# Altium PCB RPE_PCB.PcbDoc (part 1 of 2)
Units mm, origin at the board's own origin, x right, y up, seen from the top; angles counter-clockwise.
Board outline 86.99 x 60.07 mm, 4 copper layers (Top Layer, GND, Layer 2, Bottom Layer), stack 0.603 mm thick; 49 components, 31 nets, 149 pads, 32 vias.
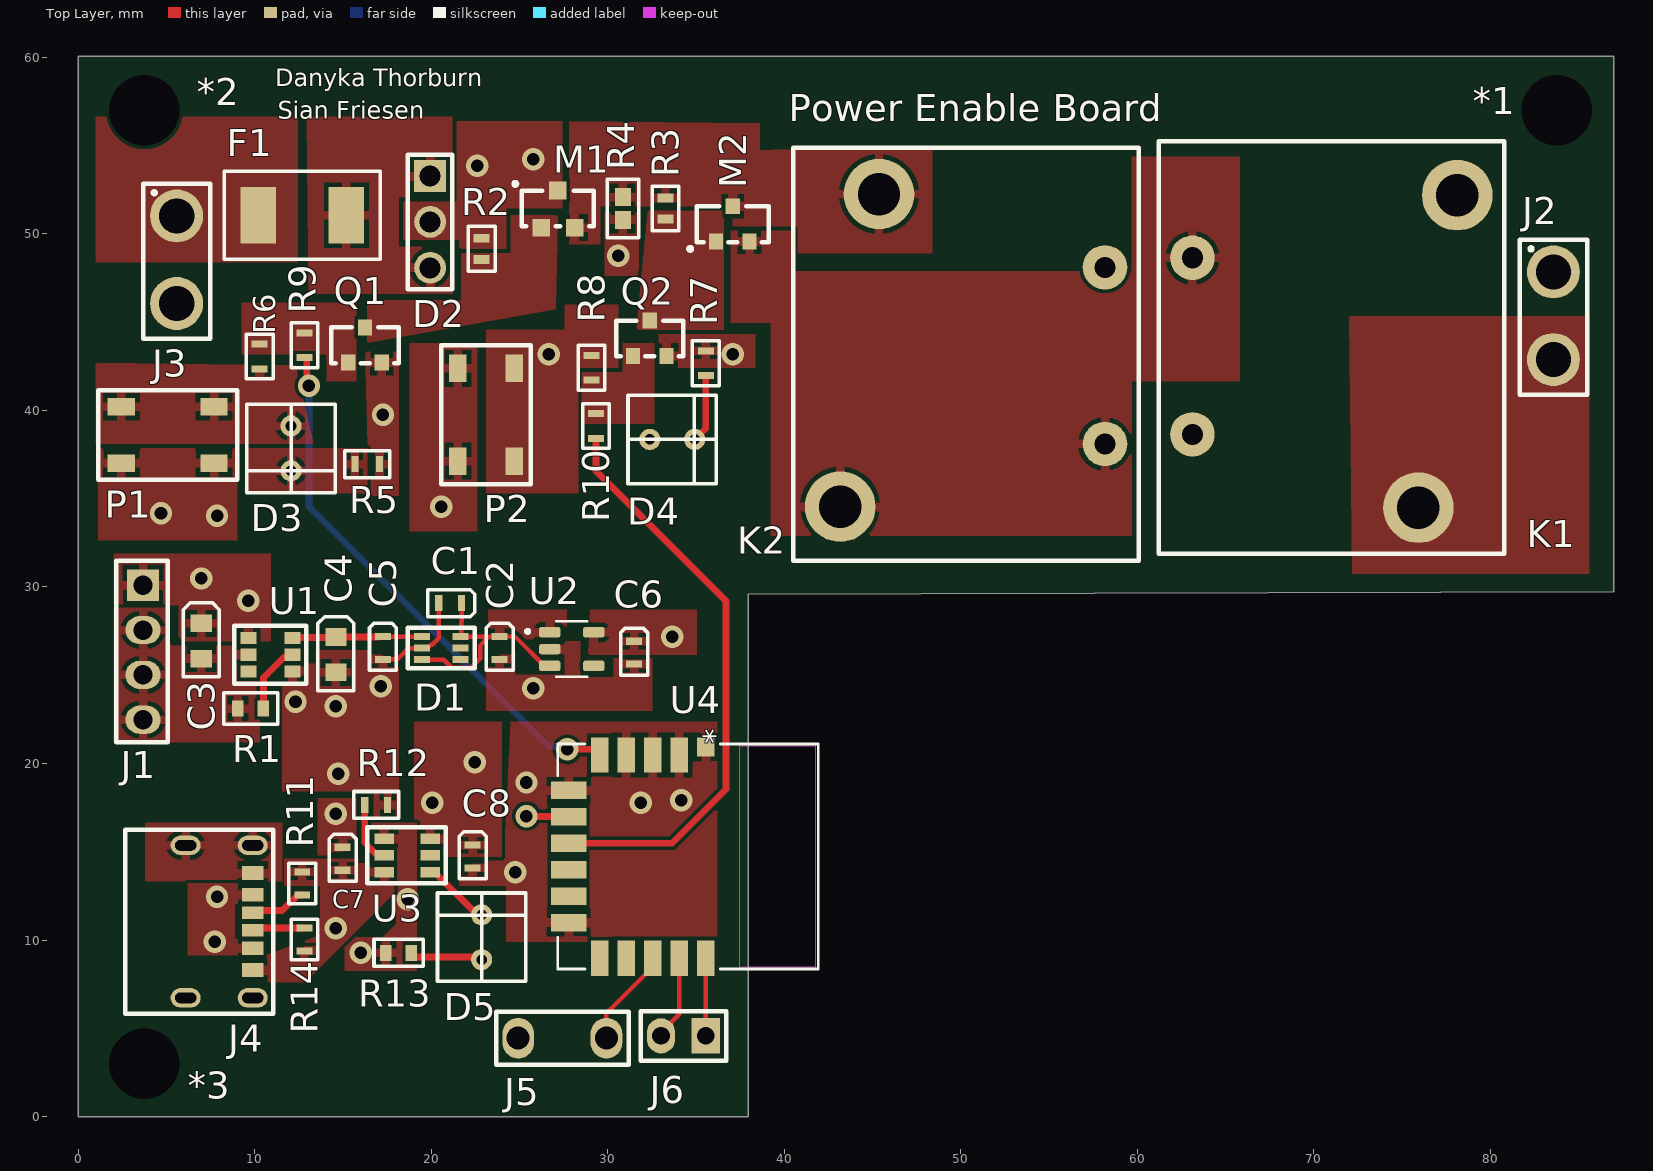
[diagram p0: Top Layer view]
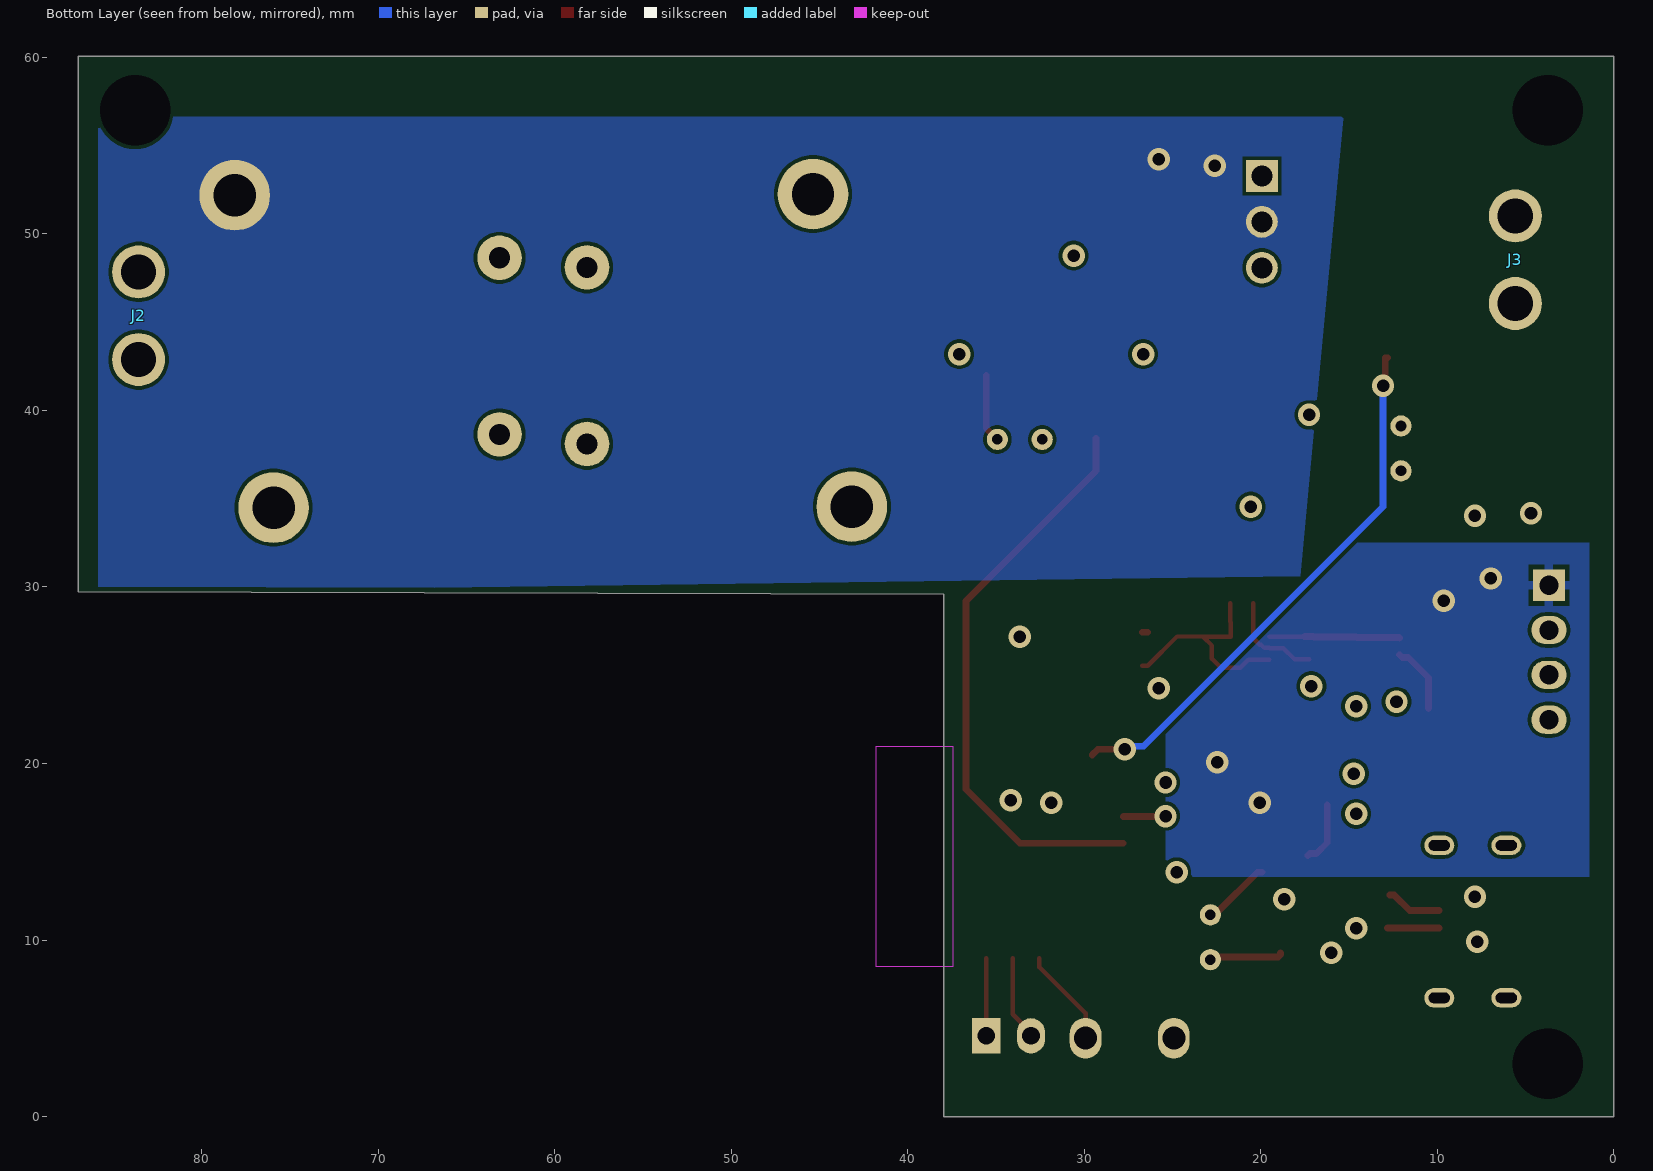
[diagram p1: Bottom Layer view, seen from below]
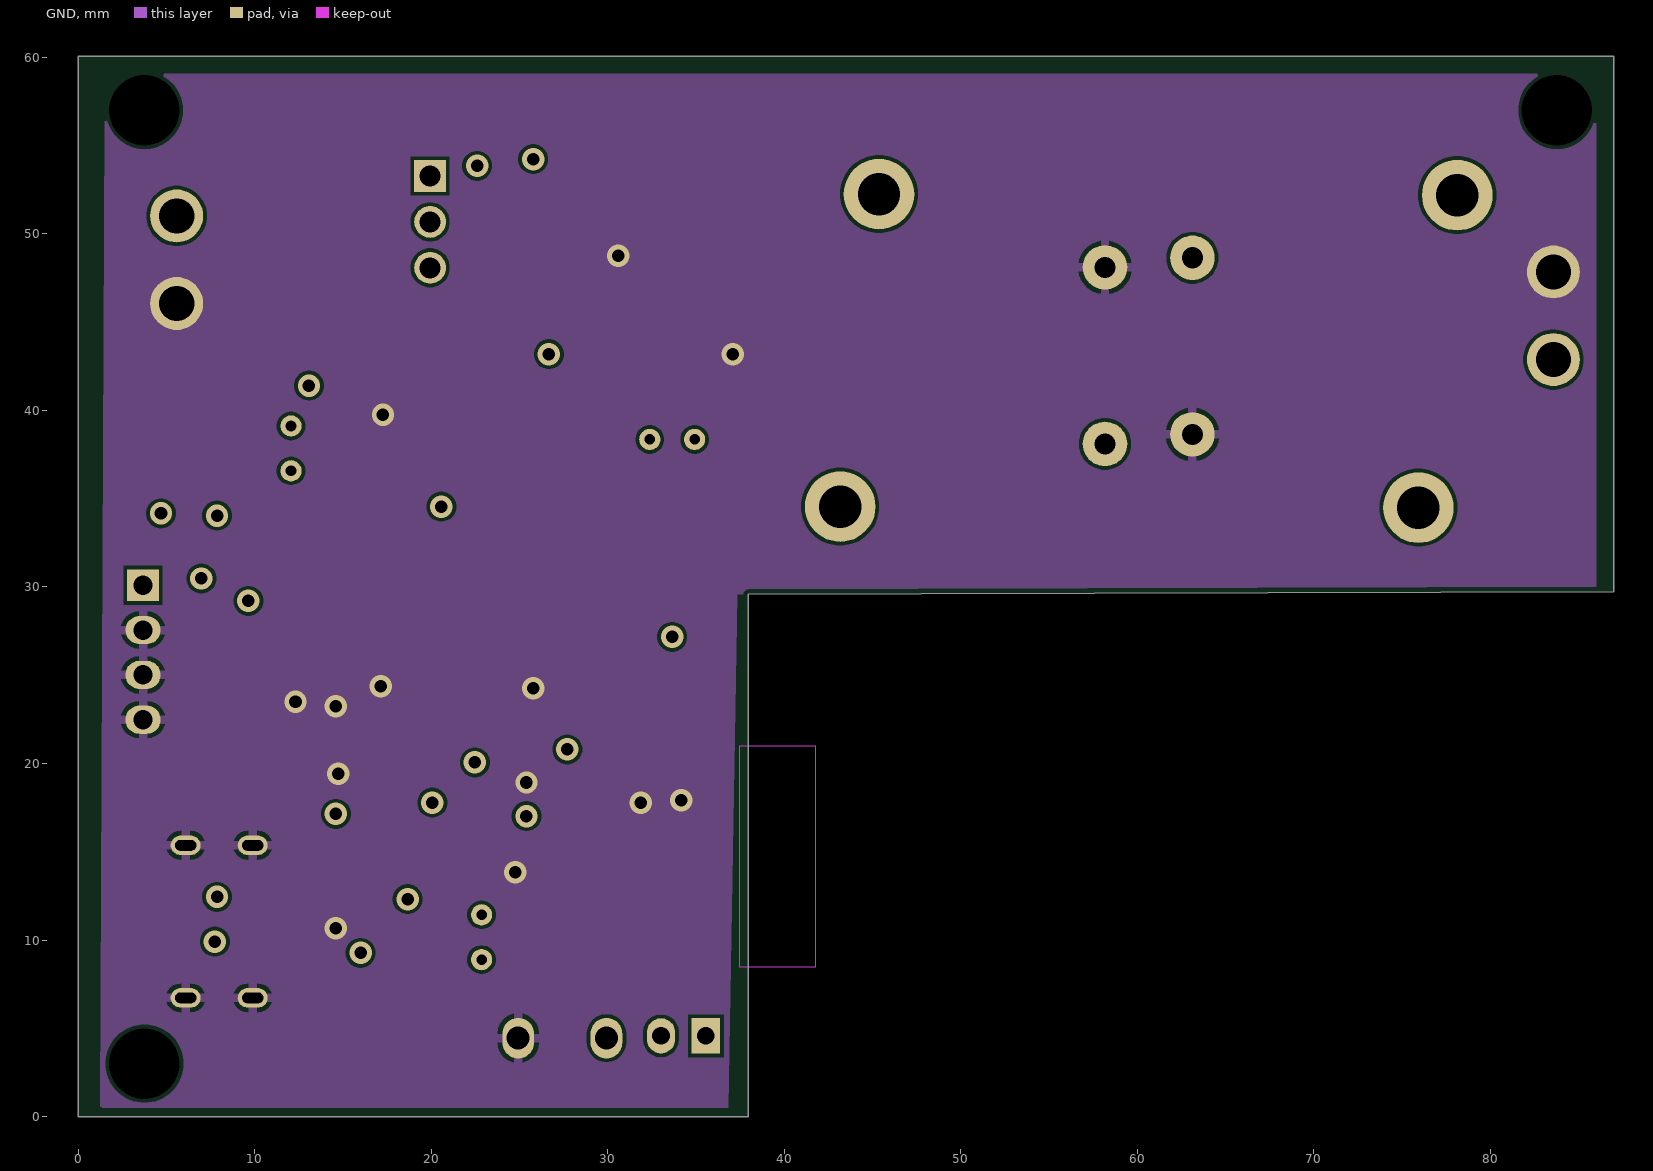
[diagram p2: GND]
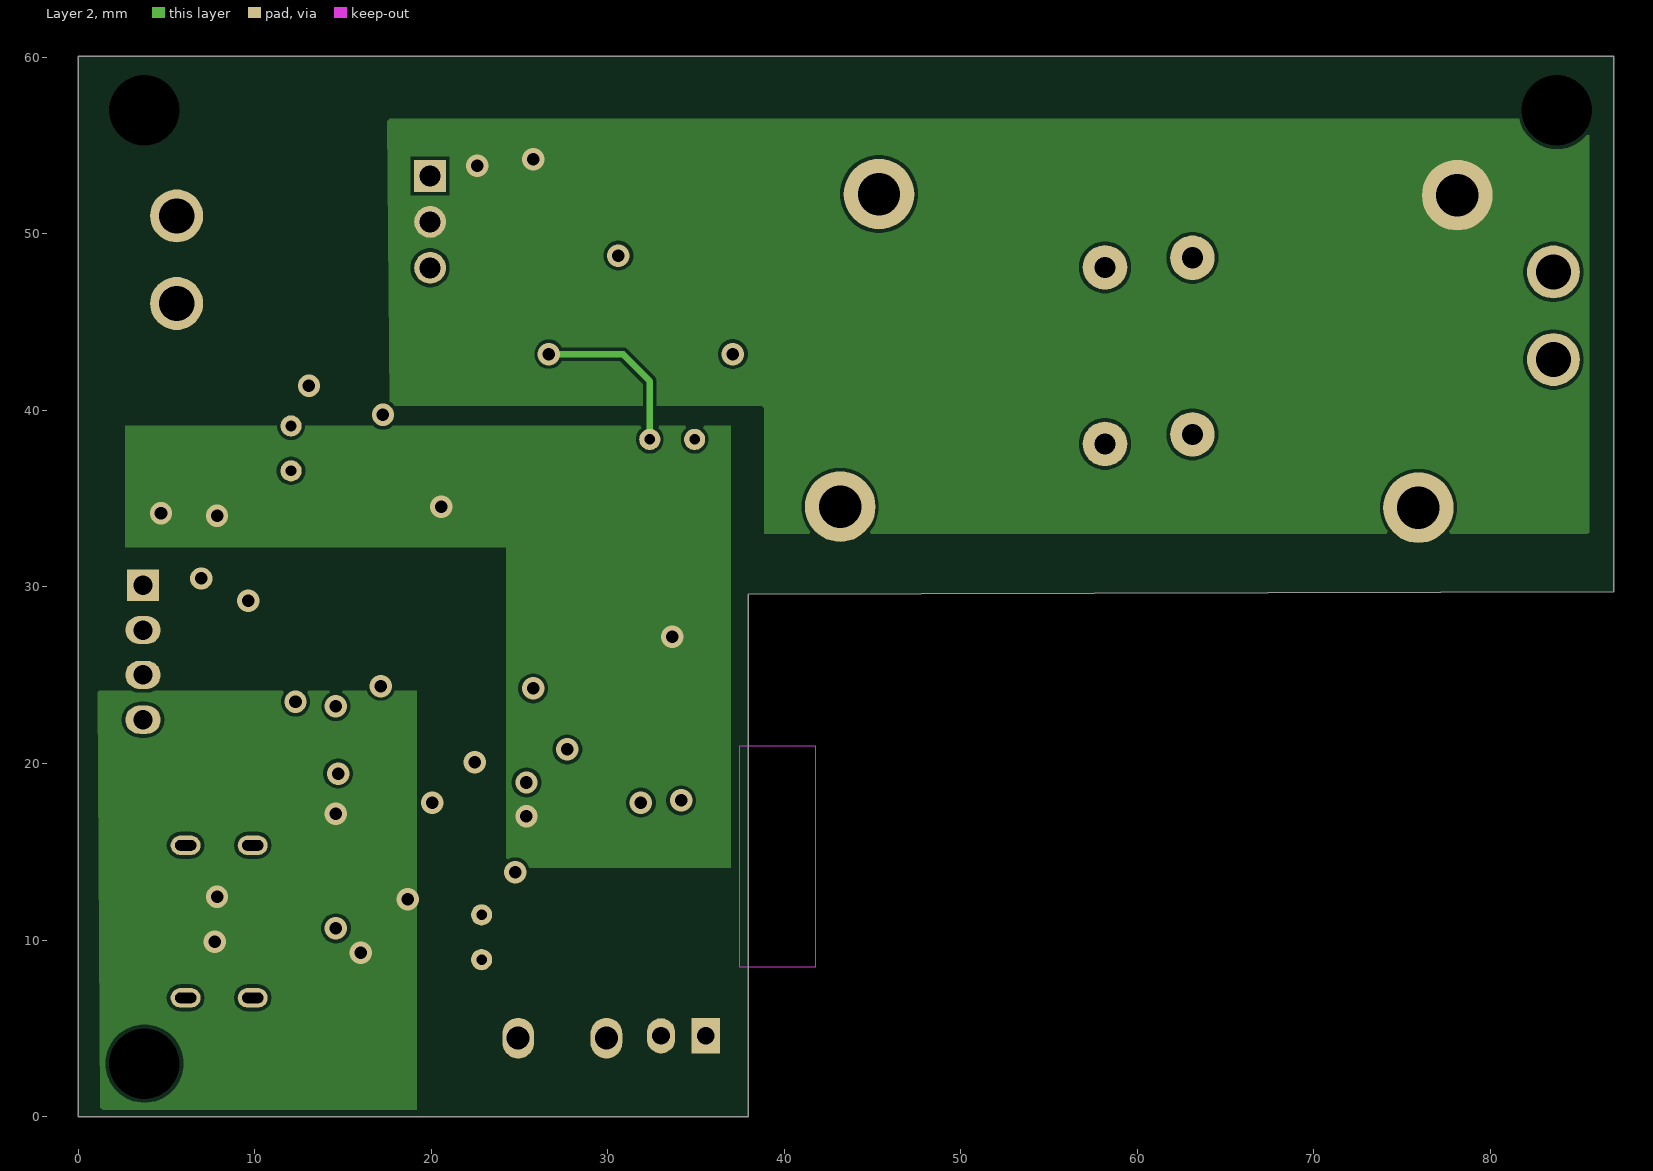
[diagram p3: Layer 2]

## Layer stack, top to bottom
Top Solder: solder mask 0.0102, Solder Resist, Dk 3.5
Top Layer: signal copper 0.0356
Dielectric 2: prepreg 0.0711, PP-006, Dk 4.1
GND: signal copper 0.035
Dielectric 1: dielectric 0.32, FR-4, Dk 4.8
Layer 2: signal copper 0.035
Dielectric 5: prepreg 0.0711, PP-006, Dk 4.1
Bottom Layer: signal copper 0.0356
Bottom Solder: solder mask 0.0102, Solder Resist, Dk 3.5

## Board outline
86.995,29.721 86.995,60.071 0,60.071 0,0 37.973,0 37.973,29.575

## Design rules (kind name [scope] priority, off if disabled: settings)
BoardOutlineClearance [All] p1: gap=0.3 ignorepadtopadclearanceinfootprint=FALSE except(0.4: Arc-SplitBarrior Arc-SplitContinuation Track-SplitBarrior Track-SplitContinuation SMDPad-SplitBarrior SMDPad-SplitContinuation THPad-SplitBarrior THPad-SplitContinuation Via-SplitBarrior Via-SplitContinuation Fill-SplitBarrior Fill-SplitContinuation Poly-SplitBarrior Poly-SplitContinuation Region-SplitBarrior Region-SplitContinuation Text-SplitBarrior Text-SplitContinuation)
Clearance "Clearance Different Nets" [All] p1: gap=0.2 ignorepadtopadclearanceinfootprint=FALSE except(0.089: Arc-Arc Arc-Track Arc-SMDPad Track-Track Track-SMDPad; 0.127: SMDPad-SMDPad SMDPad-Via THPad-Via Via-Via; 0.254: Arc-Via Arc-Text Track-Via Track-Text SMDPad-Text THPad-Text Via-Text Fill-Text Poly-Text Region-Text Text-Text; 0.5: THPad-THPad Via-Hole)
Clearance "Clearance Same Nets" [All] p2: gap=0.2 ignorepadtopadclearanceinfootprint=FALSE except(0.089: Arc-Arc Arc-Track Arc-SMDPad Track-Track Track-SMDPad SMDPad-SMDPad; 0.127: SMDPad-Via THPad-Via; 0.254: Arc-Via Arc-Text Track-Via Track-Text SMDPad-Text THPad-Text Via-Via Via-Text Fill-Text Poly-Text Region-Text Text-Text)
Clearance "Clearance Bottom Layer" [OnLayer('Bottom Layer')] p3: gap=0.203 ignorepadtopadclearanceinfootprint=TRUE except(0.254: Arc-Text Track-Text SMDPad-Text THPad-Text Via-Text Fill-Text Poly-Text Region-Text Text-Text)
Clearance "Clearance Top Layer" [OnLayer('Top Layer')] p4: gap=0.203 ignorepadtopadclearanceinfootprint=TRUE except(0.254: Arc-Text Track-Text SMDPad-Text THPad-Text Via-Text Fill-Text Poly-Text Region-Text Text-Text)
HoleSize [All] p1: absolutevalues=TRUE maxlimit=6.3 minlimit=0.2 maxpercent=80.000 minpercent=20.000
MinimumAnnularRing [All] p1: minimumring=0.13
MinimumSolderMaskSliver [All] p1: minsoldermaskwidth=0.1
PolygonConnect PolygonConnect_12 [InNet('NetJ2_2')] p1: connectstyle=Direct reliefconductorwidth=0.254 reliefentries=4 polygonreliefangle="90 Angle" airgapwidth=0.254
PolygonConnect PolygonConnect_11 [InNet('NetK1_1')] p2: connectstyle=Direct reliefconductorwidth=0.254 reliefentries=4 polygonreliefangle="90 Angle" airgapwidth=0.254
PolygonConnect PolygonConnect_10 [InNet('NetK1_2')] p3: connectstyle=Direct reliefconductorwidth=0.254 reliefentries=4 polygonreliefangle="90 Angle" airgapwidth=0.254
PolygonConnect PolygonConnect_9 [InNet('NetM2_G')] p4: connectstyle=Direct reliefconductorwidth=0.254 reliefentries=4 polygonreliefangle="90 Angle" airgapwidth=0.254
PolygonConnect PolygonConnect_8 [InNet('NetQ2_B')] p5: connectstyle=Direct reliefconductorwidth=0.254 reliefentries=4 polygonreliefangle="90 Angle" airgapwidth=0.254
PolygonConnect PolygonConnect_7 [InNet('NetD5_+')] p6: connectstyle=Direct reliefconductorwidth=0.254 reliefentries=4 polygonreliefangle="90 Angle" airgapwidth=0.254
PolygonConnect PolygonConnect_6 [InNet('NetD4_+')] p7: connectstyle=Direct reliefconductorwidth=0.254 reliefentries=4 polygonreliefangle="90 Angle" airgapwidth=0.254
PolygonConnect PolygonConnect_5 [InNet('NetM1_G')] p8: connectstyle=Direct reliefconductorwidth=0.254 reliefentries=4 polygonreliefangle="90 Angle" airgapwidth=0.254
PolygonConnect PolygonConnect_4 [InNet('NetQ1_B')] p9: connectstyle=Direct reliefconductorwidth=0.254 reliefentries=4 polygonreliefangle="90 Angle" airgapwidth=0.254
PolygonConnect PolygonConnect_3 [InNet('NetD1_+')] p10: connectstyle=Direct reliefconductorwidth=0.254 reliefentries=4 polygonreliefangle="90 Angle" airgapwidth=0.254
PolygonConnect PolygonConnect_2 [InNet('NetF1_2')] p11: connectstyle=Direct reliefconductorwidth=0.254 reliefentries=4 polygonreliefangle="90 Angle" airgapwidth=0.254
PolygonConnect [InNet('14V6')] p12: connectstyle=Direct reliefconductorwidth=0.254 reliefentries=4 polygonreliefangle="90 Angle" airgapwidth=0.254
PolygonConnect PolygonConnect_1 [All] p13: thpad.connectstyle=Relief thpad.reliefconductorwidth=0.508 thpad.reliefentries=4 thpad.polygonreliefangle="90 Angle" thpad.airgapwidth=0.254 smdpad.connectstyle=Relief smdpad.reliefconductorwidth=0.508 smdpad.reliefentries=4 smdpad.polygonreliefangle="90 Angle" smdpad.airgapwidth=0.254 via.connectstyle=Direct via.reliefconductorwidth=0.508 via.reliefentries=4 via.polygonreliefangle="90 Angle" via.airgapwidth=0.254
RoutingCorners [All] p1: cornerstyle=Round minsetback=2.54 maxsetback=2.54
RoutingVias [All] p1: holewidth=0.5 width=1 viastyle="Through Hole" minholewidth=0.2 minwidth=0.35 maxholewidth=1 maxwidth=2
SilkToSilkClearance [All] p1: silktosilkclearance=0.1
SilkToSolderMaskClearance [IsPad] p1: minsilkscreentomaskgap=0.1 clearancetoexposedcopper=TRUE
SolderMaskExpansion [All] p1: expansion=0.102 istentingtop=FALSE
Width [All] p1: maxlimit=2.54 minlimit=0.089 preferedwidth=0.381
25 further rules are at their usual default settings.

## Components (designator, comment, footprint, x,y, rotation, side; value= is the part's Value field where it differs from the comment)
*1 "Mounting Holes" "Mounting Holes" 83.762,57 r0 top
*2 "Mounting Holes" "Mounting Holes" 3.762,57 r0 top
*3 "Mounting Holes" "Mounting Holes" 3.762,3 r0 top
C1 "1 uF Capacitor" CL10B105MO8NNWC 21.082,29.083 r0 top value=1uF
C2 "1 uF Capacitor" CL10B105MO8NNWC 23.876,26.543 r90 top value=1uF
C3 "GRM188D71A106MA73J" GRM188D71A106MA73J 6.985,26.94 r90 top value=10uF
C4 "GRM188D71A106MA73J" GRM188D71A106MA73J 14.605,26.162 r90 top value=10uF
C5 "1 uF Capacitor" CL10B105MO8NNWC 17.272,26.543 r90 top value=1uF
C6 "1 uF Capacitor" CL10B105MO8NNWC 31.496,26.274 r90 top value=1uF
C7 "1 uF Capacitor" CL10B105MO8NNWC 14.986,14.605 r90 top value=1uF
C8 "1 uF Capacitor" CL10B105MO8NNWC 22.352,14.732 r90 top value=1uF
D1 "*" LM66100DCKR 20.574,26.543 r0 top
D2 "100V DIODE" FERD40H100STS 19.939,50.673 r270 top
D3 "RED THROUGH HOLE LED" C503B-RCN-CW0Z0AA2 12.065,37.846 r270 top
D4 "RED THROUGH HOLE LED" C503B-RCN-CW0Z0AA2 33.655,38.354 r0 top
D5 "RED THROUGH HOLE LED" C503B-RCN-CW0Z0AA2 22.86,10.16 r90 top
F1 "40A FUSE" 0ACA-9400-TE 12.7,51.054 r180 top
J1 "9-103323-0-04" 9-103323-0-04 3.683,26.289 r0 top
J2 "FIT0588" ? 83.566,45.339 r0 top
J3 "FIT0588" ? 5.588,48.514 r0 top
J4 "USB4125-GF-A-0190" USB4125-GF-A 6.096,11.047 r0 top
J5 "691137710002" 691137710002 27.432,4.445 r270 top
J6 "PREC002SAAN-RC" PREC002SAAN-RC 34.29,4.572 r270 top
K1 "50A RELAY" J116F11A12VDCS.9 63.119,48.641 r270 top
K2 "50A RELAY" J116F11A12VDCS.9 58.166,38.1 r90 top
M1 "ZXM61N03FTA" ZXM61N03FTA 27.178,50.419 r180 top
M2 "ZXM61P03FTA" ZXM61P03FTA 37.084,49.53 r180 top
P1 "*" "PTS 647 SK50 SMTR2 LFS" 5.08,38.608 r180 top
P2 "*" "PTS 647 SK50 SMTR2 LFS" 23.114,39.751 r90 top
Q1 "MMBT4401-7-F" MMBT4401-13-F 16.256,43.561 r270 top
Q2 "MMBT4401-7-F" MMBT4401-13-F 32.385,43.942 r270 top
R1 "RMCF0603FT68K0" RMCF0603FT68K0 9.779,23.114 r0 top value="68 kΩ"
R2 "CR0603-FX-2701ELF" CR0603-FX-2701ELF 22.86,49.149 r90 top value=2.7kΩ
R3 "CR0603-FX-2701ELF" CR0603-FX-2701ELF 33.274,51.435 r90 top value=2.7kΩ
R4 "100 kΩ" CR0603FB100KS1 30.861,51.435 r90 top
R5 "SG73P1JTTD1601F" SG73P1JTTD1601F 16.383,36.957 r180 top value=1.6kΩ
R6 "SG73P1JTTD1601F" SG73P1JTTD1601F 10.287,43.053 r90 top value=1.6kΩ
R7 "SG73P1JTTD1601F" SG73P1JTTD1601F 35.56,42.672 r270 top value=1.6kΩ
R8 "SG73P1JTTD1601F" SG73P1JTTD1601F 29.083,42.418 r270 top value=1.6kΩ
R9 "SG73P1JTTD1601F" SG73P1JTTD1601F 12.827,43.688 r90 top value=1.6kΩ
R10 "SG73P1JTTD1601F" SG73P1JTTD1601F 29.337,39.116 r90 top value=1.6kΩ
R11 "RC0603FR-075K1L" RC0603FR-075K1L 12.7,13.208 r270 top value=5.1kΩ
R12 "Chip Resistor" RC0603JR-133K3L 16.891,17.653 r180 top value=3.3kΩ
R13 "RMCF0603FT620R" RMCF0603FT620R 18.161,9.271 r180 top value=620Ω
R14 "RC0603FR-075K1L" RC0603FR-075K1L 12.827,10.033 r90 top value=5.1kΩ
U1 "*" AP22653AW6-7 10.882,26.162 r0 top
U2 "*" TC1015-3.3VCT713 28.067,26.416 r0 top
U3 "BQ21040DBVR" BQ21040DBVR 18.669,14.859 r0 top
U4 "DA14531MOD-00F01002" DA14531MOD_REN 34.544,14.732 r270 top

## Footprints (in the part's own frame and the unit in brackets; to place one, negate y for a bottom-side part, rotate by r counter-clockwise, add the part's x,y. Pads: shape width x height; smd on the part's side, far side on the other; paste and mask are expansions set on the pad)
0ACA-9400-TE [mm] "FUSE BOARD MOUNT 40A 63VDC 2SMD"
  rect 2x3.18 smd: 1(-2.5,0) 2(2.5,0)
  silkscreen extent -4.41,-2.5 4.41,2.5
9-103323-0-04 [mm] "CONN HEADER R/A 4POS 2.54MM"
  rect 1.8x1.8 hole 1.1: 1(0,3.81)
  oval 2x1.6 hole 1.1: 2(0,1.27) 3(0,-1.27) 4(0,-3.81)
  silkscreen extent -1.52,-5.08 1.4,5.21
691137710002 [mm] "TERM BLK 2POS SIDE ENTRY 5MM PCB"
  oval 2.3x1.8 hole 1.3: 1(0,2.5) 2(0,-2.5)
  silkscreen extent -1.5,-3.75 1.5,3.75
AP22653AW6-7 [mm] "LOAD SWITCH,SOT26,T&R,3K"
  rect 0.9x0.7 smd mask+0: 1(-1.23,0.95) 2(-1.23,0) 3(-1.23,-0.95) 4(1.27,-0.95) 5(1.27,0) 6(1.27,0.95)
  silkscreen extent -2.03,-1.65 2.03,1.65
BQ21040DBVR [mm] "IC BATT CHG LI-ION 1CELL SOT23-6"
  rect 1.1x0.6 smd: 1(1.27,-0.066) 2(1.27,0.884) 3(1.27,-1.016) 4(-1.33,-0.066) 5(-1.33,-1.016) 6(-1.33,0.884)
  silkscreen extent -2.29,-1.65 2.16,1.52
C503B-RCN-CW0Z0AA2 [mm] "LED RED CLEAR 5MM ROUND T/H"
  round 1.2 hole 0.6: +(-1.27,0) -(1.27,0)
  silkscreen extent -2.5,-2.5 2.5,2.5
CL10B105MO8NNWC [mm] "CAP CER 1UF 16V X7R 0603"
  rect 0.4x0.9 smd: 1(-0.65,0) 2(0.65,0)
  silkscreen extent -1.27,-0.76 1.4,0.76
CR0603-FX-2701ELF [mm] "RES SMD 2.7K OHM 1% 1/10W 0603"
  rect 0.5x0.9 smd: 1(-0.6,0) 2(0.6,0)
  silkscreen extent -1.27,-0.76 1.27,0.76
CR0603FB100KS1 [mm] "RES,SMD,0603,1%,100K,1/10W"
  rect 1x0.9 smd mask+0: 1(-0.65,0) 2(0.65,0)
  silkscreen extent -1.65,-0.89 1.65,0.89
DA14531MOD_REN [mil]
  rect 43x39 smd paste+0 mask+0: J1(-244.4,39.5)
  rect 79x39 smd paste+0 mask+0: J2(-226.4,-19.6) J3(-226.4,-78.7) J4(-226.4,-137.8) J5(-226.4,-196.9) J12(226.4,-196.9) J13(226.4,-137.8) J14(226.4,-78.7) J15(226.4,-19.6) J16(226.4,39.5)
  rect 39x79 smd paste+0 mask+0: J6(-147.75,-265.75) J7(-88.65,-265.75) J8(-29.55,-265.75) J9(29.55,-265.75) J10(88.65,-265.75) J11(147.75,-265.75)
  Keep-Out Layer region: -246,285.5 -246,114.5 246,114.5 246,285.5
  silkscreen extent -251,-291 251,291
FERD40H100STS [mm] "DIODE FERD 100V 40A TO220AB"
  rect 1.8x1.8 hole 1.2: +(-2.6,0)
  round 1.8 hole 1.2: +(2.6,0) -(0,0)
  silkscreen extent -3.81,-1.27 3.81,1.27
GRM188D71A106MA73J [mm] "CAP CER 10UF 10V X7T 0603"
  rect 1x1.2 smd: 1(-1,0) 2(1,0)
  silkscreen extent -2.03,-1.02 2.16,1.02
J116F11A12VDCS.9 [mm] "RELAY GEN PURPOSE SPST 50A 12V"
  round 4 hole 2.4: 1(-3.55,15) 2(14.15,12.8)
  round 2.524 hole 1.2: 3(0,0) 4(10,0)
  silkscreen extent -6.6,-1.91 16.76,17.65
LM66100DCKR [mm] "IC OR CTRLR IDEAL DIODE SC70-6"
  rect 0.9x0.4 smd mask+0: 1(-1.1,0.65) 2(-1.1,0) 3(-1.1,-0.65) 4(1.1,-0.65) 5(1.1,0) 6(1.1,0.65)
  silkscreen extent -1.91,-1.14 1.91,1.14
MMBT4401-13-F [mm] "TRANS NPN 40V 0.6A SOT23-3"
  rect 0.9x0.8 smd: B(0.857,-0.95) C(-1.143,0) E(0.857,0.95)
  silkscreen extent -1.14,-1.91 0.89,1.91
"Mounting Holes" [mil]
  round 60 hole 157.48 unplated: 1(0,0)
PREC002SAAN-RC [mm] "CONN HEADER VERT 2POS 2.54MM"
  rect 2x1.6 hole 1: 1(0,1.27)
  oval 2x1.6 hole 1: 2(0,-1.27)
  silkscreen extent -1.4,-2.41 1.4,2.41
"PTS 647 SK50 SMTR2 LFS" [mm] "SWITCH TACTILE SPST-NO 0.05A 12V"
  rect 1.55x1 smd: 1(-2.625,1.6) 2(2.625,1.6) 3(-2.625,-1.6) 4(2.625,-1.6)
  silkscreen extent -3.94,-2.54 3.94,2.54
RC0603FR-075K1L [mm] "RES 5.1K OHM 1% 1/10W 0603"
  rect 0.4x0.9 smd: 1(-0.65,0) 2(0.65,0)
  silkscreen extent -1.14,-0.76 1.14,0.76
RC0603JR-133K3L [mm] "RES 3.3K OHM 5% 1/10W 0603"
  rect 0.4x0.9 smd: 1(-0.65,0) 2(0.65,0)
  silkscreen extent -1.27,-0.76 1.27,0.76
RMCF0603FT68K0 [mm] "68k ohm Chip resistor"
  rect 0.65x0.9 smd: 1(-0.725,0) 2(0.725,0)
  silkscreen extent -1.52,-0.89 1.52,0.89
RMCF0603FT620R [mm] "RES 620 OHM 1% 1/10W 0603"
  rect 0.65x0.9 smd: 1(-0.725,0) 2(0.725,0)
  silkscreen extent -1.4,-0.76 1.4,0.76
SG73P1JTTD1601F [mm] "RES 1.6K OHM 1% 1/3W 0603"
  rect 0.4x0.9 smd: 1(-0.7,0) 2(0.7,0)
  silkscreen extent -1.27,-0.76 1.27,0.76
TC1015-3.3VCT713 [mm] "IC REG LINEAR 3.3V 100MA SOT23-5"
  rrect50% 1.22x0.6 smd: 1(-1.347,1.016) 2(-1.347,0.066) 3(-1.347,-0.884) 4(1.143,-0.884) 5(1.143,1.016)
  silkscreen extent -2.7,-1.5 0.78,1.64
USB4125-GF-A [mm] "CONN RCPT TYPE C 6P SMD RA"
  rect 1.2x0.7 smd mask+0: A5(3.8,0.5) B5(3.8,-0.5)
  rect 1.2x0.76 smd mask+0: A9(3.8,-1.52) B9(3.8,1.52)
  rect 1.2x0.8 smd mask+0: A12(3.8,-2.75) B12(3.8,2.75)
  oval 1.7x1.1 hole 0.6 slot 1.2 at 0 deg: Shell_1(0,4.32) Shell_2(3.8,4.32) Shell_3(0,-4.32) Shell_4(3.8,-4.32)
  silkscreen extent -3.43,-5.21 4.95,5.21
ZXM61N03FTA [mm] "MOSFET N-CH 30V 1.4A SOT23-3"
  rect 1x1 smd: D(0,-2.032) G(0.95,0.068) S(-0.95,0.068)
  silkscreen extent -2.03,-2.51 2.51,0
ZXM61P03FTA [mm] "MOSFET P-CH 30V 1.1A SOT23-3"
  rect 0.8x0.9 smd: D(0,-2.032) G(0.95,-0.032) S(-0.95,-0.032)
  silkscreen extent -2.03,-2.03 2.51,0.48
? [mm] "HIGH QUALITY GOLD PLATED XT90 MA Bullet Connector"
  round 3 hole 2: 1(0,2.5) 2(0,-2.46)
  round 2.5 smd far side: 2(0,-2.46)
  silkscreen extent -1.91,-4.44 1.91,4.32

## Part data
C1 C2 C5 C6 C7 C8: library part CL10B105MO8NNWC, "SMD Multilayer Ceramic Capacitor, 1 µF, 16 V, 0603 [1608 Metric], ± 20%, X7R, CL Series", Case Code (Imperial)=0603, Case Code (Metric)=1608, Dielectric=1511DielectricType, Manufacturer=Samsung, Max Operating Temperature=125°C, Min Operating Temperature=-55°C, Supplier Part Number=1276-6524-1-ND, Tolerance=20%, Voltage Rating=16V, Case/Package=0603, Category="Ceramic Capacitors", ComponentLink1Description=https://media.digikey.com/pdf/Data%20Sheets/Samsung%20PDFs/CL10B105MO8NNWC.pdf?src-supplier=Digikey, ComponentLink1URL=https://media.digikey.com/pdf/Data%20Sheets/Samsung%20PDFs/CL10B105MO8NNWC.pdf?src-supplier=Digikey, ComponentLink2Description=http://www.farnell.com/datasheets/2710574.pdf?src-supplier=Farnell, ComponentLink2URL=http://www.farnell.com/datasheets/2710574.pdf?src-supplier=Farnell, ComponentLink3Description=https://datasheet.octopart.com/CL10B105MO8NNWC-Samsung-Electro-Mechanics-datasheet-120079234.pdf?src-supplier=Future+Electronics, ComponentLink3URL=https://datasheet.octopart.com/CL10B105MO8NNWC-Samsung-Electro-Mechanics-datasheet-120079234.pdf?src-supplier=Future+Electronics, ComponentLink4Description=http://www.farnell.com/datasheets/2710574.pdf?src-supplier=Newark, ComponentLink4URL=http://www.farnell.com/datasheets/2710574.pdf?src-supplier=Newark, ComponentLink5Description=http://www.farnell.com/datasheets/2710574.pdf?src-supplier=Element14, ComponentLink5URL=http://www.farnell.com/datasheets/2710574.pdf?src-supplier=Element14, Height=900um, Length=0.063inch, Manufacturer Part Number=CL10B105MO8NNWC, Material=4241ConductorMaterial, Mounting Technology="Surface Mount", Packaging="Cut Tape", Pricing="1=0.1, 10=0.034, 50=0.0196, 100=0.0152, 500=0.01142, 1000=0.00897 (USD)", RoHS=Yes, RoHS Compliant=Yes, Series=CL, Stock=1284189, Supplier=Digikey, Thickness=0.035inch, Voltage Rating (DC)=16V, Width=0.031inch
C3 C4: "Cap 10UF 10VDC X7T 20% SMD 0603 Paper Tape", Case/Package=0603, Dielectric=X7T, Manufacturer=Murata, Max Operating Temperature=125°C, Min Operating Temperature=-55°C, Package Quantity=10000, Supplier Part Number=490-GRM188D71A106MA73JCT-ND, Tolerance=20%, Voltage Rating=10V, Category="Ceramic Capacitors", ComponentLink1Description=http://www.mouser.com/ds/2/281/c02e-2905.pdf?src-supplier=Mouser, ComponentLink1URL=http://www.mouser.com/ds/2/281/c02e-2905.pdf?src-supplier=Mouser, ComponentLink2Description=http://search.murata.co.jp/Ceramy/image/img/A01X/partnumbering_e_01.pdf?src-supplier=Digikey, ComponentLink2URL=http://search.murata.co.jp/Ceramy/image/img/A01X/partnumbering_e_01.pdf?src-supplier=Digikey, Manufacturer Part Number=GRM188D71A106MA73J, Mounting Technology="Surface Mount", Packaging="Tape and Reel", Pricing="1=0.3, 10=0.197, 50=0.145, 100=0.118, 500=0.09316, 1000=0.07867, 2500=0.07453, 5000=0.07039 (USD)", RoHS=Yes, RoHS Compliant=Yes, Series=GRM, Stock=9799, Supplier=Digikey, Voltage Rating (DC)=10V, Weight=0.000222oz
D1: library part LM66100DCKR, "1.5-V to 5.5-V, 1.5-A, 0.5-uA IQ ideal diode with Integrated FET 6-SC70 -40 to 105", Manufacturer="Texas Instruments", Max Operating Temperature=105°C, Max Output current=1.5A, Min Operating Temperature=-40°C, Supplier Part Number=296-53541-1-ND, Category="Integrated Circuits (ICs)", ComponentLink1Description=http://www.ti.com/general/docs/suppproductinfo.tsp?distId=10&amp;gotoUrl=http%3A%2F%2Fwww.ti.com%2Flit%2Fgpn%2flm66100&src-supplier=Digikey, ComponentLink1URL=http://www.ti.com/general/docs/suppproductinfo.tsp?distId=10&amp;gotoUrl=http%3A%2F%2Fwww.ti.com%2Flit%2Fgpn%2flm66100&src-supplier=Digikey, Manufacturer Part Number=LM66100DCKR, Mounting Technology="Surface Mount", Pricing="1=0.41, 10=0.332, 25=0.304, 100=0.2262, 250=0.20504, 500=0.16968, 1000=0.12726 (USD)", RoHS=Yes, Series=-, Stock=1921, Supplier=Digikey, Turn-Off Delay Time=2us, Turn-On Delay Time=27us
D2: library part FERD40H100STS, "FERD40H100 Series 100 V 40 A Field Effect Rectifier Diode - TO-220AB", Average Rectified Current=40A, Case/Package=TO-220-3, Manufacturer=STMicroelectronics, Max Reverse Voltage (DC)=100V, Supplier Part Number=497-16954-ND, Category="Rectifier Diodes", ComponentLink1Description=http://www.st.com/content/ccc/resource/technical/document/datasheet/group3/4e/b5/b8/47/b6/af/41/d6/DM00281757/files/DM00281757.pdf/jcr:content/translations/en.DM00281757.pdf?src-supplier=Digikey, ComponentLink1URL=http://www.st.com/content/ccc/resource/technical/document/datasheet/group3/4e/b5/b8/47/b6/af/41/d6/DM00281757/files/DM00281757.pdf/jcr:content/translations/en.DM00281757.pdf?src-supplier=Digikey, ComponentLink2Description=https://datasheet.octopart.com/FERD40H100STS-STMicroelectronics-datasheet-62332851.pdf?src-supplier=Future+Electronics, ComponentLink2URL=https://datasheet.octopart.com/FERD40H100STS-STMicroelectronics-datasheet-62332851.pdf?src-supplier=Future+Electronics, ComponentLink3Description=https://datasheet.octopart.com/FERD40H100STS-STMicroelectronics-datasheet-141402762.pdf?src-supplier=TME, ComponentLink3URL=https://datasheet.octopart.com/FERD40H100STS-STMicroelectronics-datasheet-141402762.pdf?src-supplier=TME, Diode Type=RECTIFIER, Manufacturer Part Number=FERD40H100STS, Mounting Technology="Through Hole", Packaging=Rail/Tube, Pricing="1=1.4, 50=1.1266, 100=0.8927, 500=0.7567, 1000=0.61641, 2000=0.58028, 5000=0.55264, 10000=0.52714 (USD)", RoHS=Yes, RoHS Compliant=Yes, Series=-, Stock=1657, Supplier=Digikey
D3 D4 D5: library part C503B-RCN-CW0Z0AA2, "CREE - C503B-RCN-CW0Z0AA2 - LED, Red, Through Hole, T-1 3/4 (5mm), 20 mA, 2.1 V, 624 nm", Case/Package=Radial, Color=Red, Forward Current=20mA, Forward Voltage=2.1V, Lens Color=Colorless, Manufacturer=Cree, Max Operating Temperature=100°C, Min Operating Temperature=-40°C, Package Quantity=2500, Supplier Part Number=C503B-RCN-CW0Z0AA2CT-ND, Category=LEDs, ComponentLink1Description=https://datasheet.ciiva.com/8076/c503brasranaasaanrbsrbnabsabnrcsrcnacsacn1079-8076255.pdf?src-supplier=Element14, ComponentLink1URL=https://datasheet.ciiva.com/8076/c503brasranaasaanrbsrbnabsabnrcsrcnacsacn1079-8076255.pdf?src-supplier=Element14, ComponentLink2Description=https://datasheet.ciiva.com/46396/1783695-46396283.pdf?src-supplier=Element14, ComponentLink2URL=https://datasheet.ciiva.com/46396/1783695-46396283.pdf?src-supplier=Element14, ComponentLink3Description=https://datasheet.ciiva.com/2116/c503brasranaasaanrbsrbnabsabnrcsrcnacsacn1079-2116093.pdf?src-supplier=Digikey, ComponentLink3URL=https://datasheet.ciiva.com/2116/c503brasranaasaanrbsrbnabsabnrcsrcnacsacn1079-2116093.pdf?src-supplier=Digikey, Dominant Wavelength=624nm, Height=10.3mm, Illumination Color=Red, Lens Style=Dome,Elliptical,Round, Lens Transparency=Clear, Luminous Intensity=7500mcd, Manufacturer Part Number=C503B-RCN-CW0Z0AA2, Mounting Technology="Through Hole", Number of LEDs=1, Packaging="Cut Tape", Pins=5, Pricing="1=0.18, 10=0.167, 100=0.1548, 1000=0.139 (USD)", Reach SVHC Compliant=Unknown, RoHS=Yes, RoHS Compliant=Yes, Series=-, Stock=49819, Supplier=Digikey, Test Current=20mA, Viewing Angle=30°, Wavelength=624nm
F1: library part 0ACA-9400-TE, "Bel Fuse, Internal Part #: 0ACA-9400-TE 40A FUSE", Manufacturer=Bel, Supplier Part Number=507-0ACA-9400-TECT-ND, Category=Fuses, Manufacturer Part Number=0ACA-9400-TE, Pricing="1=1.32, 5=1.282, 10=1.199, 50=0.9926, 100=0.8272, 250=0.80652, 500=0.68244 (USD)", RoHS=Yes, Stock=695, Supplier=Digikey
J1: "CONN HEADR BRKWAY .100 04POS R/A 4 PIN HEADER", Case/Package=100, Flammability Rating="UL94 V-0", Housing Color=Black, Manufacturer="TE Connectivity", Max Operating Temperature=105°C, Min Operating Temperature=-65°C, Supplier Part Number=A32705-04-ND, Category=Connectors, ComponentLink1Description=http://www.te.com/commerce/DocumentDelivery/DDEController?Action=srchrtrv&DocNm=103323&DocType=Customer+Drawing&DocLang=English&src-supplier=Digikey, ComponentLink1URL=http://www.te.com/commerce/DocumentDelivery/DDEController?Action=srchrtrv&DocNm=103323&DocType=Customer+Drawing&DocLang=English&src-supplier=Digikey, Contact Finish - Mating=TIN, Contact Material="Copper Alloy", Contact Shape=Square, Contact Type="Male Pin", Fastening Type=Pull, Gender=Male, Height=3.5mm, Housing Material=Plastic, Insulation Color=Black, Insulation Material=Thermoplastic, Lead Free="Lead Free", Length=9.75mm, Manufacturer Part Number=9-103323-0-04, Mounting Technology="Through Hole", Number of Contacts=4, Number of Positions=4, Number of Rows=1, Packaging=Bulk, Pricing="1=0.69, 10=0.672, 100=0.5422, 500=0.4801, 1000=0.4208, 5000=0.36714, 10000=0.34172 (USD)", RoHS=Yes, Series="AMPMODU MOD II", Stock=9773, Supplier=Digikey, Termination=Solder, Width=2.29mm
J2 J3: "High Quality Gold Plated Male and Female Bullet Connector", Manufacturer=DFRobot, Supplier Part Number=1738-1438-ND, Category=LDO, ComponentLink1Description=https://media.digikey.com/pdf/Data%20Sheets/DFRobot%20PDFs/FIT0588_Web.pdf?src-supplier=Digikey, ComponentLink1URL=https://media.digikey.com/pdf/Data%20Sheets/DFRobot%20PDFs/FIT0588_Web.pdf?src-supplier=Digikey, Manufacturer Part Number=FIT0588, Pricing="1=3.9 (USD)", RoHS=No, Stock=1280, Supplier=Digikey
J4: "USB Connector, 24 Contact(s), Female, Right Angle, Solder Terminal, Locking, Receptacle", Current Rating=3A, Manufacturer="Global Connector Technology", Max Operating Temperature=85°C, Min Operating Temperature=-30°C, Supplier Part Number=56AJ0230, Voltage Rating=20V, Category="USB Connectors", Contact Material=157ConductorMaterial, Height=3.41mm, Manufacturer Part Number=USB4125-GF-A-0190, Number of Contacts=6NUMBER, Pricing="1=0.379, 50=0.379, 100=0.347, 250=0.347, 500=0.32, 1000=0.32, 1500=0.32, 3000=0.298 (USD)", RoHS=No, Stock=2157, Supplier=Newark, USB Standard=6108USBStandard
J5: "Series 1377 - 5.00 mm Horizontal Entry with Pressure Clamp WR-TBL, 2 pin", Color=Green, Current=16A, Manufacturer="Wurth Electronics", Max Operating Temperature=120°C, Min Operating Temperature=-30°C, Supplier Part Number=732-10955-ND, Voltage=300V, Category="Terminal Blocks", ComponentLink1Description=https://katalog.we-online.de/em/datasheet/691137710002.pdf?src-supplier=Digikey, ComponentLink1URL=https://katalog.we-online.de/em/datasheet/691137710002.pdf?src-supplier=Digikey, Contact Material=153,154ConductorMaterial, Current Rating=16A, Height=11.6mm, Housing Material=PC, Lead Pitch=5mm, Manufacturer Part Number=691137710002, Mounting Technology="Through Hole", Number of Contacts=2NUMBER, Number of Levels=1, Number of Positions Per Level=2, Number of Rows=1NUMBER, Pins=2NUMBER, Plating="Copper Alloy,ZINC PLATED", Pricing="1=0.41, 10=0.363, 50=0.32, 100=0.287, 500=0.277 (USD)", RoHS=Yes, RoHS Compliant=Yes, Series="WR-TBL Series 1377", Stock=5754, Supplier=Digikey, Termination=Screw, Voltage Rating=300V, Wire Gauge (Max)=30AWG, Wire Gauge (Min)=12AWG
J6: "CONN HEADER VERT 2POS 2.54MM"
K1 K2: library part J116F11A12VDCS.9, "Relay Gen Purpose SPST 50A 12V", Manufacturer="CIT Relay & Switch", Supplier Part Number=2449-J116F11A12VDCS.9-ND, Category="Power Relays", Manufacturer Part Number=J116F11A12VDCS.9, Pricing="1=3.35, 15=3.136, 30=2.78767, 60=2.64817, 105=2.50886, 255=2.23008, 510=2.09071, 1005=1.95132, 5010=1.88163 (USD)", RoHS=No, Stock=434, Supplier=Digikey
M1: "N-Channel 30V 1.4A (Ta) 625mW (Ta) Surface Mount SOT-23-3", Case/Package=SOT-23, Continuous Drain Current (ID)=1.4A, Current Rating=1.2A, Drain to Source Resistance=220mR, Drain to Source Voltage (Vdss)=30V, Gate to Source Voltage (Vgs)=20V, Input Capacitance=150pF, Manufacturer="Diodes Zetex", Max Operating Temperature=150°C, Max Power Dissipation=625mW, Min Operating Temperature=-55°C, Package Quantity=3000, Power Dissipation=806mW, Supplier Part Number=ZXM61N03FCT-ND, Category=MOSFETs, ComponentLink1Description=https://datasheet.ciiva.com/11176/zxm61n03f-11176547.pdf?src-supplier=Avnet, ComponentLink1URL=https://datasheet.ciiva.com/11176/zxm61n03f-11176547.pdf?src-supplier=Avnet, ComponentLink2Description=https://datasheet.ciiva.com/935/zxm61n03f-935122.pdf?src-supplier=Digikey, ComponentLink2URL=https://datasheet.ciiva.com/935/zxm61n03f-935122.pdf?src-supplier=Digikey, ComponentLink3Description=https://datasheet.ciiva.com/5775/1643170-5775147.pdf?src-supplier=Farnell, ComponentLink3URL=https://datasheet.ciiva.com/5775/1643170-5775147.pdf?src-supplier=Farnell, ComponentLink4Description=https://datasheet.ciiva.com/935/zxm61n03f-935123.pdf?src-supplier=Digikey, ComponentLink4URL=https://datasheet.ciiva.com/935/zxm61n03f-935123.pdf?src-supplier=Digikey, ComponentLink5Description=https://datasheet.ciiva.com/935/zxm61n03f-935124.pdf?src-supplier=Digikey, ComponentLink5URL=https://datasheet.ciiva.com/935/zxm61n03f-935124.pdf?src-supplier=Digikey, ComponentLink6Description=https://datasheet.ciiva.com/8024/1643170-8024088.pdf?src-supplier=Element14, ComponentLink6URL=https://datasheet.ciiva.com/8024/1643170-8024088.pdf?src-supplier=Element14, Drain-source On Resistance-Max=220mR, Dual Supply Voltage=30V, Fall Time=2.5ns, Height=1.02mm, Lead Free="Lead Free", Length=3.04mm, Manufacturer Part Number=ZXM61N03FTA, Mounting Technology="Surface Mount", Nominal Vgs=1V, Number of Channels=1, Number of Elements=1, Packaging="Tape and Reel", Pins=3, Polarity=N-CHANNEL, Pricing="1=0.46, 10=0.397, 100=0.2757, 500=0.21528, 1000=0.17498 (USD)", Radiation Hardening=No, Rds On Max=220mR, Reach SVHC Compliant=No, Rise Time=2.5ns, RoHS=Yes, RoHS Compliant=Yes, Series=-, Stock=146742, Supplier=Digikey, Termination=SMD/SMT, Turn-Off Delay Time=5.8ns, Turn-On Delay Time=1.9ns, Voltage Rating (DC)=30V, Weight=0.000282oz, Width=1.4mm
M2: "ZXM61P03F 30 V 0.35 Ohm P-Channel Enhancement Mode Vertical DMOS FET - SOT-23", Case/Package=SOT-23, Continuous Drain Current (ID)=1.1A, Current Rating=-1.1A, Drain to Source Resistance=550mR, Drain to Source Voltage (Vdss)=30V, Drain-source On Resistance-Max=350mR, Dual Supply Voltage=-30V, Gate to Source Voltage (Vgs)=20V, Input Capacitance=140pF, Manufacturer="Diodes Zetex", Max Operating Temperature=150°C, Max Power Dissipation=625mW, Min Operating Temperature=-55°C, Package Quantity=3000, Power Dissipation=806mW, Supplier Part Number=ZXM61P03FCT-ND, Category=MOSFETs, ComponentLink1Description=https://datasheet.ciiva.com/11176/zxm61p03f-11176401.pdf?src-supplier=Avnet, ComponentLink1URL=https://datasheet.ciiva.com/11176/zxm61p03f-11176401.pdf?src-supplier=Avnet, ComponentLink2Description=https://datasheet.ciiva.com/11176/zxm61p03f-11176557.pdf?src-supplier=Avnet, ComponentLink2URL=https://datasheet.ciiva.com/11176/zxm61p03f-11176557.pdf?src-supplier=Avnet, ComponentLink3Description=https://datasheet.ciiva.com/935/zxm61p03f-935140.pdf?src-supplier=Digikey, ComponentLink3URL=https://datasheet.ciiva.com/935/zxm61p03f-935140.pdf?src-supplier=Digikey, ComponentLink4Description=https://datasheet.ciiva.com/935/zxm61p03f-935141.pdf?src-supplier=Digikey, ComponentLink4URL=https://datasheet.ciiva.com/935/zxm61p03f-935141.pdf?src-supplier=Digikey, ComponentLink5Description=https://datasheet.ciiva.com/935/zxm61p03f-935142.pdf?src-supplier=Digikey, ComponentLink5URL=https://datasheet.ciiva.com/935/zxm61p03f-935142.pdf?src-supplier=Digikey, ComponentLink6Description=https://datasheet.ciiva.com/4443/zxm61p03f-4443147.pdf?src-supplier=Mouser, ComponentLink6URL=https://datasheet.ciiva.com/4443/zxm61p03f-4443147.pdf?src-supplier=Mouser, ComponentLink7Description=https://datasheet.ciiva.com/16216/zxm61p03f-16216056.pdf?src-supplier=Future+Electronics, ComponentLink7URL=https://datasheet.ciiva.com/16216/zxm61p03f-16216056.pdf?src-supplier=Future+Electronics, Fall Time=2.9ns, Height=1.02mm, Lead Free="Lead Free", Length=3.04mm, Manufacturer Part Number=ZXM61P03FTA, Mounting Technology="Surface Mount", Nominal Vgs=-1V, Number of Channels=1, Number of Elements=1, Packaging="Tape and Reel", Pins=3, Polarity=P-CHANNEL, Pricing="1=0.42, 10=0.357, 100=0.2482, 500=0.19376, 1000=0.15748 (USD)", Radiation Hardening=No, Rds On Max=350mR, Reach SVHC Compliant=No, Rise Time=2.9ns, RoHS=Yes, RoHS Compliant=Yes, Series=-, Stock=104868, Supplier=Digikey, Termination=SMD/SMT, Turn-Off Delay Time=8.9ns, Turn-On Delay Time=1.9ns, Voltage Rating (DC)=-30V, Weight=0.000282oz, Width=1.4mm
P1 P2: library part PTS647SM70SMTR2LFS, "Switch Tactile N.O. SPST Round Button Gull Wing 0.05A 12VDC 100000Cycles 1.77N SMD T/R", Manufacturer="ITT C&K", Max Operating Temperature=70°C, Min Operating Temperature=-20°C, Operating Force=180gf, Ratings=IP40, Supplier Part Number=PTS647SM70SMTR2LFSCT-ND, Actuator Type=Standard, Category="Tactile Switches", ComponentLink1Description=https://www.ckswitches.com/media/2567/pts647.pdf?src-supplier=Digikey, ComponentLink1URL=https://www.ckswitches.com/media/2567/pts647.pdf?src-supplier=Digikey, Illumination Type=Non-Illuminated, Manufacturer Part Number=PTS647SM70SMTR2LFS, Mechanical Life=100000Cycles, Mounting Technology="Surface Mount", Packaging="Cut Tape", Pricing="1=0.26, 10=0.249, 25=0.236, 100=0.2138, 250=0.19488, 500=0.18114 (USD)", RoHS=No, Series=PTS647, Stock=62901, Supplier=Digikey, Switch Function=Off-Mom, Switch Travel=0.25mm, Termination="Gull Wing", Throw Configuration=SPST
Q1 Q2: "Bipolar Transistors - 40V NPN SMALL SIGNAL TRANSISTOR IN SOT23 package", Case/Package=SOT-23, Clock Frequency=250MHz, Collector Base Voltage (VCBO)=60V, Collector Emitter Breakdown Voltage=40V, Collector-emitter Voltage-Max=750mV, Emitter Base Voltage (VEBO)=6V, Manufacturer="Diodes Zetex", Max Collector Current=600mA, Max Operating Temperature=150°C, Max Power Dissipation=310mW, Min Operating Temperature=-55°C, Supplier Part Number=MMBT4401-7-F-ND, Category=BJTs, Collector Emitter Voltage (VCEO)=40V, ComponentLink1Description=https://datasheet.ciiva.com/15139/getdatasheetpartid-234007-15139792.pdf?src-supplier=Verical, ComponentLink1URL=https://datasheet.ciiva.com/15139/getdatasheetpartid-234007-15139792.pdf?src-supplier=Verical, Frequency=250MHz, Manufacturer Part Number=MMBT4401-7-F, Mounting Technology="Surface Mount", Number of Elements=1, Packaging="Tape and Reel", Pins=3, Polarity=NPN, Power Dissipation=310mW, Pricing="10000=0.01919, 30000=0.01775, 50000=0.01535, 100000=0.01439, 250000=0.01276 (USD)", Radiation Hardening=No, Reach SVHC Compliant=No, RoHS=Yes, RoHS Compliant=Yes, Series="Automotive, AEC-Q101", Supplier=Digikey, Transition Frequency=250MHz
R1: "Res Thick Film 0603 68K Ohm 1% 0.1W(1/10W) ±100ppm/C Pad SMD T/R Automotive AEC-Q200", Case Code (Imperial)=0603, Case Code (Metric)=1608, Manufacturer="Stackpole Electronics", Max Operating Temperature=155°C, Max Power Dissipation=100mW, Min Operating Temperature=-55°C, Package Quantity=5000, Supplier Part Number=RMCF0603FT68K0CT-ND, Temperature Coefficient=100ppm/°C, Tolerance=1%, Voltage Rating=75V, Case/Package=0603, Category="Chip SMD Resistors", ComponentLink1Description=http://components.arrow.com/part/dataview/50507743S112918N1174?src-supplier=Arrow+Electronics, ComponentLink1URL=http://components.arrow.com/part/dataview/50507743S112918N1174?src-supplier=Arrow+Electronics, ComponentLink2Description=https://www.seielect.com/catalog/SEI-Packaging.pdf?src-supplier=Digikey, ComponentLink2URL=https://www.seielect.com/catalog/SEI-Packaging.pdf?src-supplier=Digikey, ComponentLink3Description=https://www.seielect.com/catalog/SEI-RMCF_RMCP.pdf?src-supplier=Avnet, ComponentLink3URL=https://www.seielect.com/catalog/SEI-RMCF_RMCP.pdf?src-supplier=Avnet, Construction=Rectangular, Contact Plating=Tin,Matte, Depth=0.8mm, Features="Automotive AEC-Q200", Height=0.022inch, Length=0.061inch, Manufacturer Part Number=RMCF0603FT68K0, Military Standard=Not, Mounting Technology="Surface Mount", Number of Terminations=2, Packaging="Tape and Reel", Pricing="1=0.1, 10=0.015, 50=0.009, 100=0.0075, 500=0.00498, 1000=0.00425 (USD)", Radiation Hardening=No, RoHS=Yes, RoHS Compliant=Yes, Series=RMCF, Stock=195427, Supplier=Digikey, Width=0.031inch
R2 R3: "SMD Chip Resistor, 2.7 kOhm, ± 1%, 100 mW, 0603 [1608 Metric], Thick Film, General Purpose", Case Code (Imperial)=0603, Case Code (Metric)=1608, Manufacturer=Bourns, Max Operating Temperature=155°C, Max Power Dissipation=100mW, Min Operating Temperature=-55°C, Package Quantity=5000, Supplier Part Number=CR0603-FX-2701ELFCT-ND, Temperature Coefficient=100ppm/°C, Tolerance=1%, Voltage Rating=50V, Case/Package=0603, Category="Chip SMD Resistors", ComponentLink1Description=https://datasheet.ciiva.com/18607/chpreztr-18607957.pdf?src-supplier=Digikey, ComponentLink1URL=https://datasheet.ciiva.com/18607/chpreztr-18607957.pdf?src-supplier=Digikey, Contact Plating=Tin, Features="Moisture Resistant", Height=0.022inch, Length=0.063inch, Manufacturer Part Number=CR0603-FX-2701ELF, Mounting Technology="Surface Mount", Number of Terminations=2, Packaging="Tape and Reel", Power Rating=100mW, Pricing="1=0.1, 10=0.015, 50=0.009, 100=0.0075, 500=0.00498, 1000=0.00425 (USD)", Radiation Hardening=No, RoHS=Yes, RoHS Compliant=Yes, Series=CR0603, Stock=96883, Supplier=Digikey, Termination=SMD/SMT, Thickness=457um, Voltage Rating (DC)=50V, Width=0.031inch
R4: library part CR0603FB100KS1, "100 kΩ Resistor"
R5 R6 R7 R8 R9 R10: "Res, 1K6, 1%, 0.2W, 0603 Rohs Compliant: Yes", Case Code (Imperial)=0603, Case Code (Metric)=1608, Manufacturer="KOA Speer", Max Operating Temperature=155°C, Min Operating Temperature=-55°C, Package Quantity=5000, Power Rating=200mW, Resistance Tolerance=1%, Resistor Type="Thick Film", Supplier Part Number=2019-SG73P1JTTD1601FTR-ND, Temperature Coefficient=100ppm/°C, Voltage Rating=50V, Case/Package=0603, Category="Chip SMD Resistors", ComponentLink1Description=https://datasheet.ciiva.com/22640/78338-22640856.pdf?src-supplier=Farnell, ComponentLink1URL=https://datasheet.ciiva.com/22640/78338-22640856.pdf?src-supplier=Farnell, Height=0.45mm, Length=1.6mm, Manufacturer Part Number=SG73P1JTTD1601F, Packaging="Tape and Reel", Pins=2, Pricing="5000=0.01791 (USD)", Reach SVHC Compliant=Unknown, RoHS=Yes, RoHS Compliant=Yes, Series=SG73, Supplier=Digikey, Termination=SMD/SMT, Tolerance=1%, Voltage Rating (DC)=50V, Width=0.8mm
R11 R14: "SMD Chip Resistor, 5.1 kOhm, ± 1%, 100 mW, 0603 [1608 Metric], Thick Film, General Purpose", Case Code (Imperial)=0603, Case Code (Metric)=1608, Manufacturer=Yageo, Max Operating Temperature=155°C, Max Power Dissipation=100mW, Min Operating Temperature=-55°C, Package Quantity=1, Resistance Tolerance=1%, Resistor Type="Thick Film", Supplier Part Number=311-5.10KHRCT-ND, Temperature Coefficient=100ppm/°C, Voltage Rating=50V, Case/Package=0603, Category="Chip SMD Resistors", ComponentLink1Description=https://datasheet.ciiva.com/46395/443971-46395016.pdf?src-supplier=Element14, ComponentLink1URL=https://datasheet.ciiva.com/46395/443971-46395016.pdf?src-supplier=Element14, ComponentLink2Description=https://datasheet.ciiva.com/2454/pyu-r-int-thick-7-2454046.pdf?src-supplier=Digikey, ComponentLink2URL=https://datasheet.ciiva.com/2454/pyu-r-int-thick-7-2454046.pdf?src-supplier=Digikey, ComponentLink3Description=https://datasheet.ciiva.com/2454/pyu-r-int-thick-7-2454047.pdf?src-supplier=Digikey, ComponentLink3URL=https://datasheet.ciiva.com/2454/pyu-r-int-thick-7-2454047.pdf?src-supplier=Digikey, ComponentLink4Description=https://datasheet.ciiva.com/2454/pyu-r-int-thick-7-2454045.pdf?src-supplier=Digikey, ComponentLink4URL=https://datasheet.ciiva.com/2454/pyu-r-int-thick-7-2454045.pdf?src-supplier=Digikey, ComponentLink5Description=https://datasheet.ciiva.com/15189/getdatasheetpartid-326732-15189786.pdf?src-supplier=Verical, ComponentLink5URL=https://datasheet.ciiva.com/15189/getdatasheetpartid-326732-15189786.pdf?src-supplier=Verical, Construction=Rectangular, Depth=0.8mm, Features="Moisture Resistant", Height=0.022inch, Lead Free=5697LeadFree, Length=0.063inch, Manufacturer Part Number=RC0603FR-075K1L, Military Standard=Not, Number of Terminations=2, Packaging="Tape and Reel", Pins=2NUMBER, Power Rating=100mW, Pricing="1=0.1, 10=0.019, 50=0.0112, 100=0.0093, 500=0.00622, 1000=0.00532 (USD)", Reach SVHC Compliant=No, RoHS=Yes, RoHS Compliant=Yes, Series=RC, Stock=2462904, Supplier=Digikey, Termination=SMD/SMT, Tolerance=1%, Voltage Rating (DC)=50V, Width=0.031inch
R12: library part RC0603FR-133K3L, "SMD Chip Resistor, 3.3 kOhm, ± 1%, 100 mW, 0603 [1608 Metric], Thick Film, General Purpose", Case Code (Imperial)=0603, Case Code (Metric)=1608, Manufacturer=Yageo, Max Operating Temperature=155°C, Min Operating Temperature=-55°C, Power Rating=100mW, Supplier Part Number=13-RC0603FR-133K3LCT-ND, Temperature Coefficient=100ppm/°C, Tolerance=1%, Voltage Rating=50V, Case/Package=0603, Category="Chip SMD Resistors", ComponentLink1Description=http://www.mouser.com/ds/2/447/RC0603-272842.pdf?src-supplier=Mouser, ComponentLink1URL=http://www.mouser.com/ds/2/447/RC0603-272842.pdf?src-supplier=Mouser, ComponentLink2Description=https://datasheet.octopart.com/RC0603FR-133K3L-Yageo-datasheet-164759695.pdf?src-supplier=Future+Electronics, ComponentLink2URL=https://datasheet.octopart.com/RC0603FR-133K3L-Yageo-datasheet-164759695.pdf?src-supplier=Future+Electronics, Height=0.45mm, Lead Free=5697LeadFree, Length=1.6mm, Manufacturer Part Number=RC0603FR-133K3L, Packaging="Tape and Reel", Pricing="1=0.1, 10=0.019, 50=0.0114, 100=0.0094, 500=0.00628, 1000=0.00536, 5000=0.00385, 10000=0.00337 (USD)", RoHS=Yes, RoHS Compliant=Yes, Series=RC, Stock=52269, Supplier=Digikey, Termination=SMD/SMT, Width=0.8mm
R13: "Res Thick Film 0603 620 Ohm 1% 1/10W ±100ppm/°C Molded SMD SMD Paper T/R", Case Code (Imperial)=0603, Case Code (Metric)=1608, Manufacturer="Stackpole Electronics", Max Operating Temperature=155°C, Max Power Dissipation=100mW, Min Operating Temperature=-55°C, Ratings=AEC-Q200, Supplier Part Number=RMCF0603FT620RCT-ND, Temperature Coefficient=100ppm/°C, Tolerance=1%, Voltage Rating=75V, Case/Package=0603, Category="Chip SMD Resistors", ComponentLink1Description=https://www.seielect.com/Catalog/SEI-RMCF_RMCP.pdf?src-supplier=Digikey, ComponentLink1URL=https://www.seielect.com/Catalog/SEI-RMCF_RMCP.pdf?src-supplier=Digikey, ComponentLink2Description=https://www.seielect.com/catalog/SEI-Packaging.pdf?src-supplier=Digikey, ComponentLink2URL=https://www.seielect.com/catalog/SEI-Packaging.pdf?src-supplier=Digikey, ComponentLink3Description=https://www.seielect.com/catalog/SEI-RMCF_RMCP.pdf?src-supplier=Avnet, ComponentLink3URL=https://www.seielect.com/catalog/SEI-RMCF_RMCP.pdf?src-supplier=Avnet, Contact Plating=Tin,Matte, Features="Automotive AEC-Q200", Height=0.022inch, Lead Free="Lead Free", Length=0.061inch, Manufacturer Part Number=RMCF0603FT620R, Mounting Technology="Surface Mount", Number of Terminations=2, Packaging="Tape and Reel", Pricing="1=0.1, 10=0.015, 50=0.009, 100=0.0075, 500=0.00498, 1000=0.00425 (USD)", Radiation Hardening=No, RoHS=Yes, RoHS Compliant=Yes, Series=RMCF, Stock=43996, Supplier=Digikey, Width=0.031inch
U1: library part AP22653AW6-7, "PRECISION ADJUSTABLE CURRENT-LIMITED POWER SWITCHES, -40 to 85°C pF, RoHS", Manufacturer=Diodes, Supplier Part Number=31-AP22653AW6-7CT-ND, Category="USB Interface ICs", ComponentLink1Description=https://www.diodes.com/assets/Datasheets/AP22652_53_52A_53A.pdf?src-supplier=Digikey, ComponentLink1URL=https://www.diodes.com/assets/Datasheets/AP22652_53_52A_53A.pdf?src-supplier=Digikey, Manufacturer Part Number=AP22653AW6-7, Number of Channels=1NUMBER, Pricing="1=0.44, 10=0.378, 25=0.3524, 100=0.282, 250=0.2618, 500=0.22154, 1000=0.17118 (USD)", RoHS=Yes, Stock=404154, Supplier=Digikey
U2: library part TC1015-3.3VCT713, "TC1015 Series 100 mA 3.3 V Fixed Output LDO Regulator w/ Shutdown - SOT-23-5", Case/Package=SOT-23, Current Rating=100mA, Dropout Voltage=180mV, Manufacturer=Microchip, Max Operating Temperature=125°C, Max Output Voltage=3.3V, Max Supply Voltage=6V, Min Input Voltage=2.7V, Min Operating Temperature=-40°C, Package Quantity=3000, Power Supply Rejection Ratio (PSRR)=64dB, Quiescent Current=80uA, Supplier Part Number=TC1015-3.3VCT713CT-ND, Accuracy=2.5%, Category="Voltage Regulators - Linear", ComponentLink1Description=https://datasheet.ciiva.com/41463/001085540-da-01-en-ic-reg-ldo-tc1015-3-3vct713-sot-23-5-mcp-41463228.pdf?src-supplier=Conrad, ComponentLink1URL=https://datasheet.ciiva.com/41463/001085540-da-01-en-ic-reg-ldo-tc1015-3-3vct713-sot-23-5-mcp-41463228.pdf?src-supplier=Conrad, ComponentLink2Description=https://datasheet.ciiva.com/8238/jp011417-8238485.pdf?src-supplier=Avnet, ComponentLink2URL=https://datasheet.ciiva.com/8238/jp011417-8238485.pdf?src-supplier=Avnet, ComponentLink3Description=https://datasheet.ciiva.com/2040/filehandler-aspxddocname-en026002-2040022.pdf?src-supplier=Digikey, ComponentLink3URL=https://datasheet.ciiva.com/2040/filehandler-aspxddocname-en026002-2040022.pdf?src-supplier=Digikey, ComponentLink4Description=https://datasheet.ciiva.com/2040/filehandler-aspxddocname-en026002-2040023.pdf?src-supplier=Digikey, ComponentLink4URL=https://datasheet.ciiva.com/2040/filehandler-aspxddocname-en026002-2040023.pdf?src-supplier=Digikey, ComponentLink5Description=https://datasheet.ciiva.com/2040/filehandler-aspxddocname-en026002-2040024.pdf?src-supplier=Digikey, ComponentLink5URL=https://datasheet.ciiva.com/2040/filehandler-aspxddocname-en026002-2040024.pdf?src-supplier=Digikey, ComponentLink6Description=https://datasheet.ciiva.com/2075/21335e-2075754.pdf?src-supplier=Digikey, ComponentLink6URL=https://datasheet.ciiva.com/2075/21335e-2075754.pdf?src-supplier=Digikey, ComponentLink7Description=https://datasheet.ciiva.com/14562/70046349-14562758.pdf?src-supplier=Allied+Electronics, ComponentLink7URL=https://datasheet.ciiva.com/14562/70046349-14562758.pdf?src-supplier=Allied+Electronics, ComponentLink8Description=https://datasheet.ciiva.com/22711/82112-22711035.pdf?src-supplier=Element14, ComponentLink8URL=https://datasheet.ciiva.com/22711/82112-22711035.pdf?src-supplier=Element14, ComponentLink9Description=https://datasheet.ciiva.com/8041/21335e-8041544.pdf?src-supplier=Element14, ComponentLink9URL=https://datasheet.ciiva.com/8041/21335e-8041544.pdf?src-supplier=Element14, Height=1.3mm, Lead Free="Lead Free", Length=3.1mm, Manufacturer Part Number=TC1015-3.3VCT713, Max Output current=100mA, Min Output Voltage=3.3V, Min Supply Voltage=2.7V, Mounting Technology="Surface Mount", Nominal Output Voltage=3.3V, Number of Channels=1NUMBER, Number of Outputs=1, Number of Regulators=1, Output Configuration=Positive, Output Current=100mA, Output Type=Fixed, Output Voltage=3.3V, Packaging="Tape and Reel", Pins=5, Polarity=Positive, Pricing="1=0.49, 25=0.41, 100=0.36 (USD)", Radiation Hardening=No, Reach SVHC Compliant=No, RoHS=Yes, RoHS Compliant=Yes, Series=-, Stock=23325, Supplier=Digikey, Termination=SMD/SMT, Width=1.8mm
U3: "IC BAT CHG LI-ION 1 CELL SOT23-6 BATTERY CHARGER", Battery Pack Voltage=4.2V, Case/Package=SOT-23-6, Manufacturer="Texas Instruments", Max Charge Current=800mA, Max Operating Temperature=125°C, Max Supply Voltage=6.45V, Min Operating Temperature=0°C, Supplier Part Number=296-47315-6-ND, Category="Battery Management", ComponentLink1Description=http://www.ti.com/lit/ds/symlink/bq21040.pdf?src-supplier=Digikey, ComponentLink1URL=http://www.ti.com/lit/ds/symlink/bq21040.pdf?src-supplier=Digikey, ComponentLink2Description=http://www.ti.com/general/docs/suppproductinfo.tsp?distId=10&gotoUrl=http%3A%2F%2Fwww.ti.com%2Flit%2Fgpn%2Fbq21040&src-supplier=Digikey, ComponentLink2URL=http://www.ti.com/general/docs/suppproductinfo.tsp?distId=10&gotoUrl=http%3A%2F%2Fwww.ti.com%2Flit%2Fgpn%2Fbq21040&src-supplier=Digikey, ComponentLink3Description=http://www.ti.com/general/docs/suppproductinfo.tsp?distId=10&amp;gotoUrl=http%3A%2F%2Fwww.ti.com%2Flit%2Fgpn%2Fbq21040&src-supplier=Digikey, ComponentLink3URL=http://www.ti.com/general/docs/suppproductinfo.tsp?distId=10&amp;gotoUrl=http%3A%2F%2Fwww.ti.com%2Flit%2Fgpn%2Fbq21040&src-supplier=Digikey, Fault Protection="Over Voltage,Over Temperature,Short Circuit", Interface=USB, Lead Free="Lead Free", Manufacturer Part Number=BQ21040DBVR, Mounting Technology="Surface Mount", Number of Cells=1, Packaging="Cut Tape", Pricing="1=0.89, 10=0.78, 25=0.7328, 100=0.5979, 250=0.5554, 500=0.47268, 1000=0.37814 (USD)", RoHS=Yes, RoHS Compliant=Yes, Series=-, Stock=1140, Supplier=Digikey
U4: "Bluetooth Module, 1MBPS, Bluetooth 5.1 Rohs Compliant: Yes", Manufacturer=Renesas, Supplier Part Number=1695-DA14531MOD-00F01002CT-ND, Category="RF Receivers, Transceivers", ComponentLink1Description=https://datasheet.octopart.com/DA14531MOD-00F01002-Dialog-Semiconductor-datasheet-153441348.pdf?src-supplier=Farnell, ComponentLink1URL=https://datasheet.octopart.com/DA14531MOD-00F01002-Dialog-Semiconductor-datasheet-153441348.pdf?src-supplier=Farnell, ComponentLink2Description=https://datasheet.octopart.com/DA14531MOD-00F01002-Renesas-datasheet-169923465.pdf?src-supplier=Future+Electronics, ComponentLink2URL=https://datasheet.octopart.com/DA14531MOD-00F01002-Renesas-datasheet-169923465.pdf?src-supplier=Future+Electronics, Manufacturer Part Number=DA14531MOD-00F01002, Pricing="1=5.66, 10=5.05, 25=4.5448, 100=4.141, 250=3.737, 500=3.3532 (USD)", RoHS=No, Stock=218621, Supplier=Digikey

## Via types
v1: diameter 1.27, hole 0.711, Top Layer to Bottom Layer, 32 vias

## Nets (pads, with @x,y where several pads share a name; then routed paths per layer and width w, separated by ;. In a path a pad name is that pad's centre, name@x,y a point inside that pad or via, vN(x,y) a via of type N, cw(c..) or ccw(c..) an arc to the next point about the centre after c; other vN are vias at no path point)
3V3: C6.2 P1.1 P1.2 P2.1 P2.2 U2.5 U4.J7 | length 2.4
  Top Layer w0.381: v1(25.4,17.018) 25.417,17.001 27.777,17.001 U4.J7
  other v1: 33.655,27.178 7.874,34.036 4.699,34.163 20.574,34.544
14V6: D2.- K1.1 M1.D R2.2
  other v1: 22.606,53.848 25.781,54.229
+5V: C7.2 J4.A9 J4.B9 R13.2 U3.6
  other v1: 16.002,9.271 7.747,9.906 18.669,12.319 7.874,12.446 14.605,17.145
+VBAT_3V7: C3.2 C8.2 J1.1 U1.1 U3.2
  other v1: 20.066,17.78 22.479,20.066 9.652,29.21 6.985,30.48
GND: C1.1 C2.1 C3.1 C4.1 C5.1 C6.1 C7.1 C8.1 D1.2 J1.2 J1.3 J1.4 J2.1 J3.2 J4.A12 J4.B12 J4.Shell_1 J4.Shell_2 J4.Shell_3 J4.Shell_4 J5.2 K1.4 K2.4 Q1.E Q2.E R1.1 R4.1 R5.1 R7.1 R11.1 R12.1 R14.1 U1.2 U1.4 U2.2 U3.5 U4.J1 U4.J2 U4.J3 U4.J4 U4.J6 U4.J11 | length 5.6
  Top Layer w0.254: C5.1 18.09,25.893 18.725,26.528 19.517,26.528 19.532,26.543 19.812,26.543 19.993,26.724 20.058,26.724 20.432,27.098 C1.1
  other v1: 14.605,10.668 24.765,13.843 31.877,17.78 34.163,17.907 25.4,18.923 14.732,19.431 14.605,23.241 12.319,23.495 25.781,24.257 17.145,24.384 17.272,39.751 37.084,43.18 30.607,48.768
NetC1_2: C1.2 C2.2 D1.3 D1.6 U2.1 U2.3 | length 13
  Top Layer w0.254: D1.3@19.517,25.878 20.722,25.878 21.176,25.424 22.258,25.424 22.771,25.937 22.771,26.68 23.269,27.178 ; C1.2 21.732,28.021 21.717,28.006 21.717,27.178 23.269,27.178 ; U2.3 26.41,25.532 24.749,27.193 C2.2 23.284,27.193 23.269,27.178
  Top Layer w0.381: U2.1@26.41,27.432 U2.1
NetC4_2: C4.2 C5.2 D1.1 U1.6 | length 7.4
  Top Layer w0.254: C5.2@17.537,27.178 D1.1@19.517,27.178
  Top Layer w0.381: U1.6 12.177,27.137 14.58,27.137 C4.2 16.991,27.162 17.022,27.193 C5.2 17.522,27.193 C5.2@17.537,27.178
NetD2_+: D2.+ F1.1
NetD3_+: D3.+ P1.3 P1.4 R6.1
NetD3_-: D3.- R5.2
NetD4_+: D4.+ P2.3 P2.4 R8.1 | length 9.6
  Layer 2 w0.381: v1(26.67,43.18) 30.861,43.18 32.385,41.656 D4.+
NetD4_-: D4.- R7.2 | length 3.9
  Top Layer w0.381: D4.- 35.56,38.989 R7.2
NetD5_+: D5.+ R13.1 | length 4.2
  Top Layer w0.381: R13.1 18.886,9.181 19.021,9.047 22.703,9.047 D5.+
NetD5_-: D5.- U3.3 | length 3.9
  Top Layer w0.381: U3.3 20.189,13.843 22.445,11.587 22.703,11.587 D5.-
NetF1_2: F1.2 J3.1
NetJ2_2: J2.2 K1.2
NetJ4_A5: J4.A5 R11.2 | length 3.2
  Top Layer w0.381: J4.A5@9.906,11.676 11.568,11.676 12.45,12.558 R11.2